# EAGLE board OLM-base_v0.8 (EAGLE 6.4)
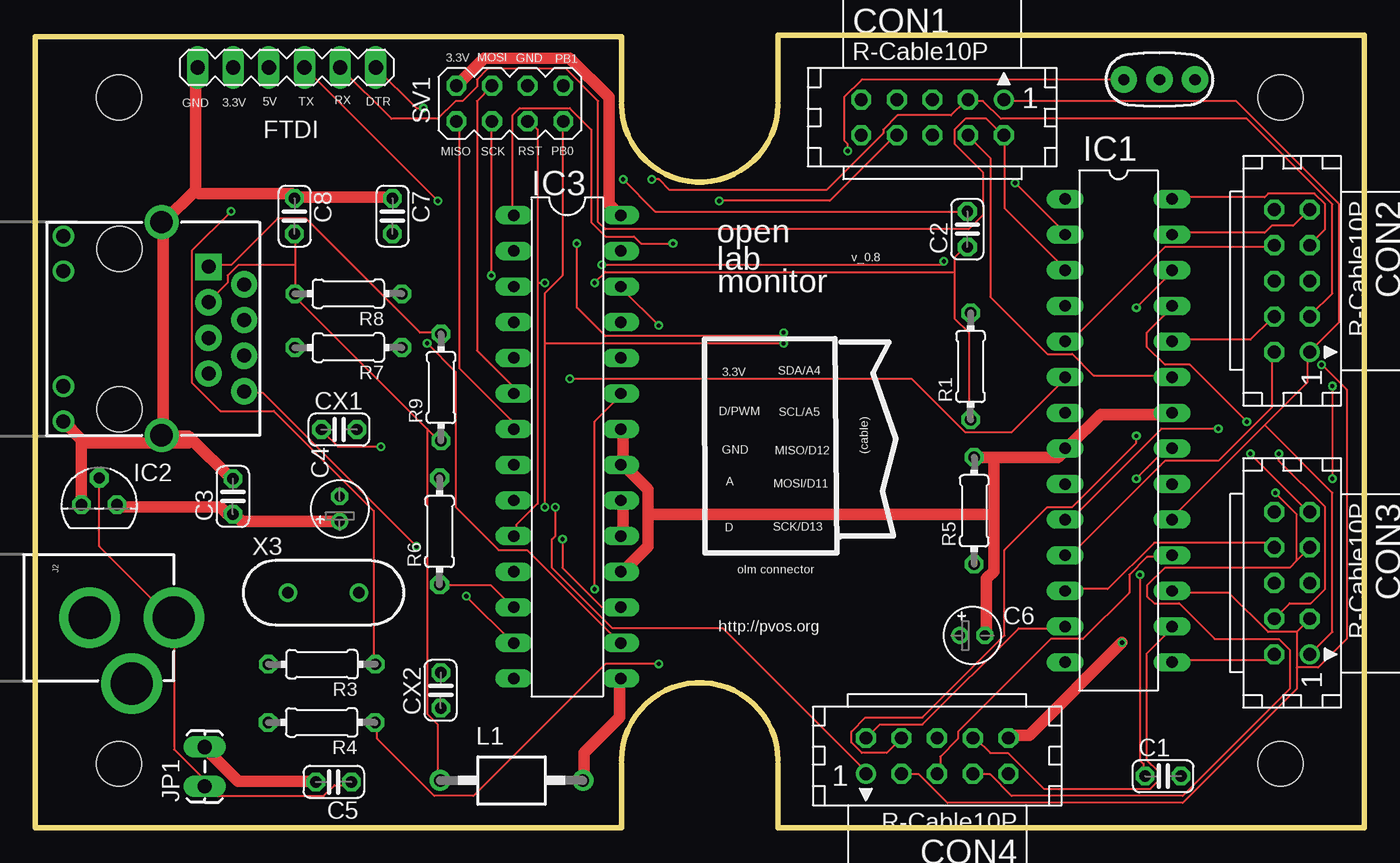
[diagram p0: board, top side]
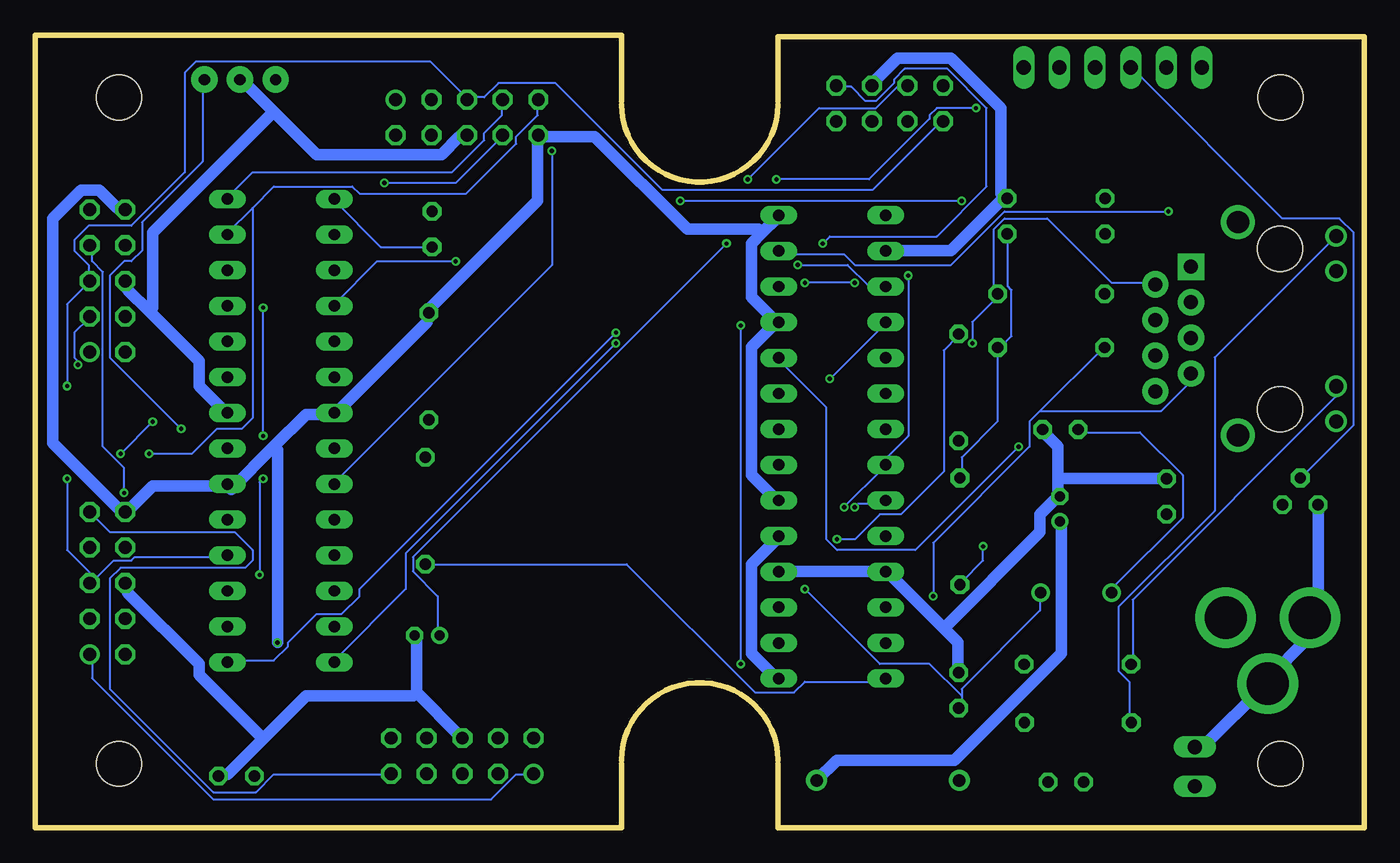
[diagram p1: board, bottom side, seen from below]

Size 94.74 x 56.52 mm. Coordinates in mm from the lower left corner, seen from the top.
Outline: 94.61,0 52.96,0 52.96,4.57
Outline: 41.78,4.57 41.78,0 0,0 0,56.39 41.78,56.39 41.78,51.82
Outline: 41.78,4.83 arc-179 52.96,4.83
Outline: 52.96,56.39 52.96,51.82
Outline: 52.96,51.56 arc-179 41.78,51.56
Outline: 52.96,56.52 94.74,56.52 94.74,0
Copper layers (1*16): Top 0.035mm / dielectric 1.5mm / Bottom 0.035mm
Design rules "Fusion_eagle_rule_v1.1": minimum track width 6mil, minimum drill 12mil, track to track 6mil, track to pad 6mil, pad to pad 6mil, via to via 6mil, smd to smd 0mil, copper to edge 10mil, drill to drill 10mil, minimum pad ring 10mil, minimum via ring 6mil, stop-mask expansion 2mil, vias tented up to drill 100mil, thermal gap 10mil
Net classes: 1 power: width 0.813 mm, clearance 0.203 mm; 2 gnd: width 0.305 mm, drill 0.559 mm, clearance 0.254 mm
Holes 3.2 mm at 5.97,52.07 88.77,52.07 88.77,4.57 5.97,4.57

## Footprints (pad centres in the part's own frame; a part is rotated, then mirrored left to right if it is on the bottom)
C025-024X044 = drill 0.813 octagon: 1 -1.27,0; 2 1.27,0
E1,8-4 = drill 0.711 pad 1.168: + -0.889,0 | drill 0.711 pad 1.168 octagon: - 0.889,0
CON10L = drill 0.914: 1 5.08,1.27 | drill 0.914 octagon: 2 5.08,-1.27; 3 2.54,1.27; 4 2.54,-1.27; 5 0,1.27; 6 0,-1.27; 7 -2.54,1.27; 8 -2.54,-1.27; 9 -5.08,1.27; 10 -5.08,-1.27
MA06-1 = drill 1.016 long: 1 0,0; 2 2.54,0; 3 5.08,0; 4 7.62,0; 5 10.16,0; 6 12.7,0
DIL28-3 = drill 0.813 long: 1 -16.51,-3.81; 2 -13.97,-3.81; 3 -11.43,-3.81; 4 -8.89,-3.81; 5 -6.35,-3.81; 6 -3.81,-3.81; 7 -1.27,-3.81; 8 1.27,-3.81; 9 3.81,-3.81; 10 6.35,-3.81; 11 8.89,-3.81; 12 11.43,-3.81; 13 13.97,-3.81; 14 16.51,-3.81; 15 16.51,3.81; 16 13.97,3.81; 17 11.43,3.81; 18 8.89,3.81; 19 6.35,3.81; 20 3.81,3.81; 21 1.27,3.81; 22 -1.27,3.81; 23 -3.81,3.81; 24 -6.35,3.81; 25 -8.89,3.81; 26 -11.43,3.81; 27 -13.97,3.81; 28 -16.51,3.81
TO92 = drill 0.813 octagon: 1 -1.27,0; 2 0,1.905; 3 1.27,0
MAGJACK = drill 1 pad 1.88 square: 1 3.175,17.445 | drill 1 pad 1.88: 2 4.445,19.985; 3 5.715,17.445; 4 6.985,19.985; 5 8.255,17.445; 6 9.525,19.985; 7 10.795,17.445; 8 12.065,19.985 | drill 1 pad 1.27: 9 1,7.1; 10 3.5,7.1; 11 11.7,7.1; 12 14.2,7.1 | drill 1.6 pad 2.184: M1 0,14.1; M2 15.2,14.1 | hole 3.2: 1.905,11.095; 13.335,11.095
POWER_JACK_PTH = drill 2.997 pad 4.318: GND 0,7.7; GNDBREAK 4.7,10.7; PWR 0,13.7
1X02_LOCK_LONGPADS = drill 1.016 long: 1 -0.127,0; 2 2.667,0
BL01RN1A = drill 0.9 pad 1.5: 1 -5.08,0; 2 5.08,0
0204/7 = drill 0.813 octagon: 1 -3.81,0; 2 3.81,0
MA04-2 = drill 0.9 octagon: 1 -3.81,-1.27; 2 -3.81,1.27; 3 -1.27,-1.27; 4 -1.27,1.27; 5 1.27,-1.27; 6 1.27,1.27; 7 3.81,-1.27; 8 3.81,1.27
RESONATOR-PTH = drill 0.8 pad 1.88: 1 -2.54,0; 2 0,0; 3 2.54,0
HC49US = drill 0.813: 1 -2.54,0; 2 2.54,0

## Placement (x,y rotation side)
C1  0.1µ  [C025-024X044]  80.39,3.68 0 top
C2  0.1µ  [C025-024X044]  66.45,42.67 90 top
C3  0.1µ  [C025-024X044]  14.1,23.62 90 top
C4  10µ  [E1,8-4]  21.72,22.73 90 top
C5  0.1µ  [C025-024X044]  21.29,3.28 180 top
C6  10u  [E1,8-4]  66.8,13.72 0 top
C7  0.1µ  [C025-024X044]  25.48,43.61 270 top
C8  0.1µ  [C025-024X044]  18.49,43.61 270 top
CON1  [CON10L]  63.96,50.65 0 top
CON2  [CON10L]  89.59,38.99 270 top
CON3  [CON10L]  89.59,17.45 270 top
CON4  [CON10L]  64.29,5.13 180 top
CX1  18p  [C025-024X044]  21.67,28.4 0 top
CX2  18p  [C025-024X044]  28.91,9.8 90 top
FTDI  FTDI  [MA06-1]  11.58,54.2 0 top
IC1  ATMEGA  [DIL28-3]  77.22,28.32 270 top
IC2  MCP1702-33  [TO92]  4.57,23.04 0 top
IC3  ENC28J60SP  [DIL28-3]  37.92,27.15 270 top
J1  MAGJACK  [MAGJACK]  -5.08,43.18 270 top
J2  POWER_JACKPTH  [POWER_JACK_PTH]  -3.81,14.99 270 top
JP1  BATT  [1X02_LOCK_LONGPADS]  12.09,3.1 90 top
L1  BL01RN1A  [BL01RN1A]  33.96,3.38 0 top
R1  10k  [0204/7]  66.67,32.89 90 top
R3  1K  [0204/7]  20.45,11.66 180 top
R4  1K  [0204/7]  20.42,7.52 180 top
R5  2.32K  [0204/7]  66.93,22.61 90 top
R6  49.9  [0204/7]  28.83,21.13 90 top
R7  49.9  [0204/7]  22.33,34.24 180 top
R8  49.9  [0204/7]  22.33,38.07 180 top
R9  49.9  [0204/7]  28.93,31.39 90 top
SV1  SPI/ISP  [MA04-2]  33.83,51.64 0 top
X1  16 MHz  [RESONATOR-PTH]  80.14,53.34 0 top
X3  25MHz  [HC49US]  20.55,16.76 0 top

## Library data of the parts
C1-C8 CX1 CX2 R1 = resistor
CON1-CON4 = con-harting; OC_FARNELL: unknown; OC_NEWARK: unknown
FTDI IC2 SV1 = JeeLabs
IC1 = atmega8
IC3 = microchip; MF: MICROCHIP; MPN: ENC28J60/SP; OC_FARNELL: 1084619; OC_NEWARK: 96K3661
J1 JP1 X1 X3 = SparkFun
J2 = SparkFun-Connectors
L1 = inductors
R3-R9 = rcl

## Nets
A0: CON1.4 IC1.23
A1: CON2.4 IC1.24
A2: CON3.4 IC1.25
A3: CON4.4 IC1.26
D0/RX: CON1.8 FTDI.4 IC1.2
D1/TX: CON1.2 FTDI.5 IC1.3
D2: IC1.4 IC3.3
D3/PWM: CON2.8 IC1.5
D4: IC1.6 IC3.4
D5/PWM: CON2.2 IC1.11
D6/PWM: CON3.8 IC1.12
D7: CON4.2 IC1.13
D10/PWM: CON4.8 IC1.16
GND [power]: C1.2 C3.2 C4.- C5.2 C6.- C7.1 C8.1 CON1.6 CON2.6 CON3.6 CON4.6 CX1.2 CX2.2 FTDI.1 IC1.8 IC1.22 IC2.1 IC3.2 IC3.11 IC3.18 IC3.21 IC3.22 J1.12 J1.M1 J1.M2 J2.GND J2.GNDBREAK JP1.2 R5.2 SV1.6 X1.2
LEDA: J1.11 R3.2
LEDB: J1.9 R4.2
MISO/D12: CON1.5 CON2.5 CON3.5 CON4.5 IC1.18 IC3.7 SV1.1
MOSI/D11: CON1.3 CON2.3 CON3.3 CON4.3 IC1.17 IC3.6 SV1.4
N$1: IC1.9 X1.1
N$19: C1.1 IC1.21
N$20: C2.2 FTDI.6
N$21: IC1.10 X1.3
N$36: J1.10
N$37: IC3.27 R3.1
N$39: IC3.26 R4.1
N$50: C6.+ IC3.1
N$51: IC3.14 R5.1
N$52: CX1.1 IC3.24 X3.1
N$53: CX2.1 IC3.23 X3.2
N$54: C7.2 R6.2 R7.1
PB0/D8: IC1.14 IC3.9 SV1.7
PB1/D9/PWM: CON3.2 IC1.15 SV1.8
RD+: IC3.13 J1.7 R7.2
RD-: IC3.12 J1.8 R6.1
RESET: C2.1 IC1.1 IC3.10 R1.1 SV1.5
SCK/D13: CON1.1 CON2.1 CON3.1 CON4.1 IC1.19 IC3.8 SV1.3
SCL/A5: CON1.7 CON2.7 CON3.7 CON4.7 IC1.28
SDA/A4: CON1.9 CON2.9 CON3.9 CON4.9 IC1.27
TCT: C8.2 J1.3 L1.1 R8.2 R9.1
TD+: IC3.17 J1.1 R9.2
TD-: IC3.16 J1.2 R8.1
VCC [power]: C3.1 C4.+ CON1.10 CON2.10 CON3.10 CON4.10 IC1.7 IC1.20 IC2.3 IC3.15 IC3.19 IC3.20 IC3.25 IC3.28 L1.2 R1.2 SV1.2
VIN: C5.1 FTDI.3 IC2.2 J2.PWR JP1.1

## Tracks (layer width: path | path; a pad name or v marks a point on that pad's centre or on a via)
A0
  Top 0.152: IC1.23 81.03,32.26 75.44,32.26 73.91,33.78 72.14,33.78 68.07,37.85 68.07,47.75 66.55,49.28 CON1.4
A1
  Top 0.152: IC1.24 81.03,34.8 86.61,34.8 88.14,36.32 CON2.4
A2  (via drill 0.3)
  Top 0.152: v86.36,28.96 82.3,33.02 80.52,33.02 79.25,34.29 79.25,35.31 81.03,37.08 IC1.25 | v88.65,26.67 88.65,26.16 91.95,22.86 91.95,17.02 90.93,16 89.41,16 CON3.4
  Bottom 0.152: v88.65,26.67 v86.36,28.96
A3  (via drill 0.3)
  Top 0.152: v78.49,37.08 81.03,39.62 IC1.26 | v78.49,27.94 78.49,27.43 73.91,22.86 72.14,22.86 69.09,19.81 69.09,13.72 63.25,7.87 59.18,7.87 58.17,6.86 58.17,6.1 58.93,5.33 60.71,5.33 61.72,6.35 CON4.4
  Bottom 0.152: v78.49,27.94 v78.49,37.08
D0/RX  (via drill 0.3)
  Top 0.152: v69.85,45.97 73.41,42.42 IC1.2 | v28.7,44.7 FTDI.4 | v48.77,44.7 56.64,44.7 61.21,49.28 CON1.8
  Bottom 0.152: v69.85,45.97 64.77,45.97 61.47,49.28 CON1.8 | v48.77,44.7 v28.7,44.7
D1/TX
  Top 0.152: IC1.3 73.41,39.88 69.09,44.2 69.09,49.28 CON1.2 68.83,49.53 67.82,50.55 66.29,50.55 65.53,49.78 65.53,48.77 67.56,46.74 67.56,43.69 66.55,42.67 40.64,42.67 40.13,43.18 40.13,51.82 37.85,54.1 32.26,54.1 31.5,53.34 31.5,52.83 30.48,51.82 29.97,51.82 28.7,50.55 25.4,50.55 FTDI.5
D2  (via drill 0.3)
  Top 0.152: v40.39,40.13 64.52,40.13 v64.77,40.39
  Bottom 0.152: v40.39,40.13 36.83,40.13 35.31,38.61 34.29,38.61 IC3.3 | v64.77,40.39 70.36,40.39 73.41,37.34 IC1.4
D3/PWM
  Top 0.152: IC1.5 73.41,34.8 73.91,34.8 80.52,41.4 88.14,41.4 CON2.8
D4  (via drill 0.3)
  Top 0.152: v38.1,32 62.48,32 66.29,28.19 69.6,28.19 73.41,32 IC1.6
  Bottom 0.152: v38.1,32 34.29,35.81 IC3.4
D5/PWM
  Top 0.152: IC1.11 73.41,19.56 73.91,19.56 80.52,26.16 84.33,26.16 88.14,29.97 88.14,33.78 CON2.2
D6/PWM
  Top 0.152: IC1.12 73.41,17.02 76.45,17.02 79.76,20.32 87.88,20.32 88.14,20.07 CON3.8
D7
  Top 0.152: IC1.13 73.41,14.22 70.1,14.22 63.25,7.37 60.2,7.37 59.44,6.6 CON4.2
D10/PWM
  Top 0.152: IC1.16 81.03,14.22 79.25,12.45 79.25,4.83 80.01,4.06 80.01,3.3 79.5,2.79 71.88,2.79 69.34,5.33 68.07,5.33 67.06,6.35 CON4.8
GND
  Top 0.813: 68.33,26.42 72.9,26.42 73.41,26.92 IC1.8 73.66,27.18 75.95,29.46 81.03,29.46 IC1.22 | 68.33,26.42 R5.2 | 68.33,26.42 68.33,22.35 | 68.33,22.35 68.33,18.29 67.82,17.78 67.82,13.72 C6.- | 11.43,45.47 11.43,54.1 FTDI.1 | 11.43,45.47 9.14,43.18 J1.M1 9.14,42.93 9.14,28.19 J1.M2 9.14,27.94 10.92,27.94 11.18,27.69 | C7.1 25.4,44.96 18.54,44.96 C8.1 18.29,45.21 11.68,45.21 11.43,45.47 | IC3.22 41.91,28.19 41.91,25.91 IC3.21 42.16,25.65 43.69,24.13 43.69,22.35 | 43.69,22.35 43.69,20.07 41.91,18.29 IC3.18 | 3.3,27.43 3.3,27.69 2.03,28.96 J1.12 | 3.3,27.43 IC2.1 | 11.18,27.69 13.97,24.89 C3.2 | 3.3,27.43 10.92,27.43 11.18,27.69 | C5.2 19.81,3.3 14.48,3.3 12.19,5.59 JP1.2 | 43.69,22.35 68.33,22.35
  Bottom 0.813: 67.56,9.65 67.56,13.72 C6.- | 67.56,9.65 64.52,6.6 CON4.6 | 78.49,6.35 75.44,9.4 67.82,9.4 67.56,9.65 | 78.49,6.35 81.03,3.81 81.53,3.81 C1.2 | 78.49,6.35 83.06,10.92 83.06,11.68 88.14,16.76 88.14,17.27 CON3.6 | 77.72,51.05 80.01,53.34 X1.2 | 77.72,51.05 74.68,48.01 65.79,48.01 64.52,49.28 64.01,49.28 CON1.6 | 86.61,36.83 83.06,33.27 83.06,31.5 81.03,29.46 IC1.22 | 86.61,36.83 88.14,38.35 88.14,38.86 CON2.6 | 77.72,51.05 86.36,42.42 86.36,37.08 86.61,36.83 | IC3.2 34.04,41.15 29.46,41.15 25.65,44.96 C7.1 25.91,45.21 25.91,51.31 29.46,54.86 33.27,54.86 35.05,53.09 SV1.6 | 29.97,14.22 34.04,18.29 IC3.11 34.54,18.29 41.66,18.29 IC3.18 | 29.97,14.22 28.96,13.21 28.96,11.18 CX2.2 | 21.84,24.89 21.84,27.18 22.86,28.19 CX1.2 | 21.84,24.89 21.84,23.62 C4.- 22.1,23.37 23.11,22.35 23.11,21.08 29.97,14.22 | 21.84,24.89 C3.2 | JP1.2 11.94,5.84 11.43,5.84 7.11,10.16 J2.GNDBREAK 6.86,10.67 4.06,13.46 4.06,14.99 J2.GND 3.81,15.24 3.3,15.75 IC2.1
LEDA
  Bottom 0.152: R3.2 16.51,11.68 16.51,16.26 2.03,30.73 2.03,31.24 J1.11
LEDB
  Bottom 0.152: R4.2 16.76,7.62 16.76,10.41 17.53,11.18 17.53,15.75 10.67,22.61 10.67,33.53 2.03,42.16 J1.9
MISO/D12  (via drill 0.3)
  Top 0.152: CON4.5 64.52,4.06 64.52,5.08 65.79,6.35 65.79,6.86 72.39,13.46 74.68,13.46 77.98,16.76 77.98,18.03 79.25,19.3 81.03,19.3 IC1.18 | IC3.7 34.04,28.45 34.04,28.96 30.23,32.77 30.23,50.29 SV1.1 | v92.46,31.5 v92.46,24.89
  Bottom 0.152: 90.42,17.78 90.68,17.53 CON3.5 90.42,17.78 | 90.42,17.78 89.15,19.05 87.88,19.05 87.63,19.3 81.03,19.3 IC1.18 | SV1.1 30.23,50.29 35.05,45.47 50.04,45.47 57.66,53.09 61.72,53.09 62.74,52.07 63.75,52.07 CON1.5 64.01,52.07 66.55,54.61 83.31,54.61 84.07,53.85 84.07,46.74 87.88,42.93 90.93,42.93 91.95,41.91 91.95,41.15 90.93,40.13 90.93,39.12 CON2.5 90.93,38.86 92.46,37.34 v92.46,31.5 | 90.42,17.78 92.46,19.81 v92.46,24.89
MOSI/D11  (via drill 0.3)
  Top 0.152: 89.92,13.97 87.88,13.97 85.09,16.76 81.03,16.76 IC1.17 | CON3.3 89.92,13.97 | 89.92,13.97 89.92,11.43 | 89.92,11.43 89.92,9.91 81.79,1.78 65.02,1.78 62.99,3.81 61.98,3.81 CON4.3 | IC3.6 34.04,30.99 34.04,31.5 31.5,34.04 31.5,51.82 32.51,52.83 SV1.4 | CON2.3 90.93,36.58 92.46,38.1 92.46,44.45 86.36,50.55 68.83,50.55 67.56,51.82 66.55,51.82 CON1.3 66.29,51.82 65.28,50.8 61.47,50.8 60.45,49.78 60.45,49.53 56.39,45.47 45.21,45.47 44.45,46.23 v43.94,46.23 | 89.92,11.43 91.44,11.43 93.47,13.46 93.47,31.24 v91.69,33.02
  Bottom 0.152: v43.94,46.23 38.86,51.31 34.8,51.31 33.27,52.83 32.77,52.83 SV1.4 | v91.69,33.02 91.69,33.27 91.95,33.53 91.95,35.31 90.93,36.32 CON2.3
N$1  (via drill 0.3)
  Top 0.152: v57.91,48.26 57.91,48.77 57.66,49.02 57.66,52.07 58.93,53.34 X1.1
  Bottom 0.152: v57.91,48.26 57.91,40.13 73.41,24.64 IC1.9
N$19  (via drill 0.3)
  Top 0.152: v78.74,18.03 78.74,4.83 78.99,4.57 78.99,3.81 C1.1 | v78.49,24.89 80.52,26.92 81.03,26.92 IC1.21
  Bottom 0.152: v78.74,18.03 78.74,24.64 v78.49,24.89
N$20  (via drill 0.3)
  Top 0.152: C2.2 44.2,43.94 v41.91,46.23 | v27.69,51.31 27.18,51.31 FTDI.6
  Bottom 0.152: v41.91,46.23 35.31,46.23 30.99,50.55 30.99,50.8 30.48,51.31 v27.69,51.31
N$21  (via drill 0.3)
  Top 0.152: v84.33,28.45 80.26,28.45 73.91,22.1 73.41,22.1 IC1.10
  Bottom 0.152: v84.33,28.45 89.41,33.53 89.41,39.37 88.39,40.39 87.88,40.39 87.12,41.15 87.12,43.18 82.8,47.5 82.8,53.34 X1.3
N$37  (via drill 0.3)
  Top 0.152: v13.97,43.94 11.18,41.15 11.18,31.75 13.21,29.72 17.02,29.72 24.13,22.61 24.13,11.68 R3.1
  Bottom 0.152: v13.97,43.94 25.65,43.94 29.46,40.13 36.32,40.13 37.08,40.89 41.66,40.89 IC3.27
N$39  (via drill 0.3)
  Top 0.152: v44.45,11.68 40.64,11.68 31.24,2.29 28.45,2.29 24.38,6.35 24.38,7.37 R4.1 | v44.45,35.81 41.91,38.35 IC3.26
  Bottom 0.152: v44.45,35.81 v44.45,11.68
N$50  (via drill 0.3)
  Top 0.152: v45.47,41.66 43.18,41.66 42.67,42.16 40.64,42.16 39.62,43.18 39.62,49.78 38.1,51.31 34.54,51.31 34.04,50.8 34.04,43.69 IC3.1
  Bottom 0.152: v45.47,41.66 67.82,19.3 67.82,18.29 66.04,16.51 66.04,13.72 C6.+
N$51
  Bottom 0.152: R5.1 52.58,18.8 43.43,9.65 40.64,9.65 39.88,10.41 34.29,10.41 IC3.14
N$52  (via drill 0.3)
  Top 0.152: v24.64,27.18 21.59,27.18 20.57,28.19 CX1.1
  Bottom 0.152: X3.1 17.78,16.76 17.78,17.27 12.95,22.1 12.95,25.15 16,28.19 20.32,28.19 CX1.1 | v24.64,27.18 32,19.81 37.59,19.81 38.35,20.57 38.35,29.97 41.66,33.27 IC3.24
N$53  (via drill 0.3)
  Top 0.152: v39.88,17.02 39.88,28.96 41.66,30.73 IC3.23
  Bottom 0.152: 28.7,9.4 28.7,9.91 23.11,15.49 23.11,16.76 X3.2 | 28.7,9.4 28.7,8.64 CX2.1 | v39.88,17.02 34.54,11.68 30.99,11.68 28.7,9.4
N$54
  Bottom 0.152: R6.2 28.7,25.15 28.7,26.42 26.16,28.96 26.16,34.04 R7.1 25.91,34.29 25.15,35.05 25.15,38.35 25.4,38.61 25.4,42.16 C7.2
PB0/D8  (via drill 0.3)
  Top 0.152: 36.32,34.54 36.32,38.1 37.59,39.37 37.59,50.29 SV1.7 | 36.32,34.54 v36.32,22.86 | 36.32,34.54 v53.34,34.54
  Bottom 0.152: v36.32,22.86 36.07,23.11 34.29,23.11 IC3.9 | v53.34,34.54 68.33,19.56 68.33,17.02 73.41,11.94 IC1.14
PB1/D9/PWM  (via drill 0.3)
  Top 0.152: CON3.2 87.88,11.94 81.03,11.94 IC1.15 | v38.61,41.66 38.61,37.08 40.64,35.05 53.09,35.05 v53.34,35.31
  Bottom 0.152: v38.61,41.66 38.1,42.16 30.48,42.16 26.92,45.72 26.92,51.31 29.72,54.1 32.77,54.1 33.53,53.34 33.53,53.09 34.8,51.82 35.56,51.82 36.58,52.83 37.59,52.83 SV1.8 | v53.34,35.31 71.63,17.02 71.63,16.51 72.9,15.24 74.68,15.24 76.71,13.21 76.71,12.95 77.72,11.94 81.03,11.94 IC1.15
RD+  (via drill 0.3)
  Top 0.152: v30.73,16.51 34.04,13.21 IC3.13
  Bottom 0.152: v30.73,16.51 30.73,20.32 23.88,27.18 23.88,28.96 23.11,29.72 | 23.11,29.72 18.54,34.29 R7.2 | 23.11,29.72 14.48,29.72 12.45,31.75 12.45,32.26 J1.7
RD-  (via drill 0.3)
  Top 0.152: R6.1 28.96,17.27 32.51,17.27 34.04,15.75 IC3.12 | v27.18,20.07 16.26,30.99 14.99,30.99 J1.8
  Bottom 0.152: v27.18,20.07 27.18,19.05 28.7,17.53 R6.1
RESET  (via drill 0.3)
  Top 0.152: 65.53,39.62 65.53,40.64 66.29,41.4 C2.1 | 65.53,39.62 65.53,36.32 66.55,35.31 66.55,29.21 R1.1 | 35.81,38.86 35.81,49.78 35.31,50.29 SV1.5 | 35.81,38.86 35.81,23.11 34.29,21.59 34.29,20.83 IC3.10 | 65.53,39.62 40.64,39.62 v39.88,38.86 | 35.81,38.86 v36.32,38.86
  Bottom 0.152: C2.1 70.1,41.4 73.41,44.7 IC1.1 | v36.32,38.86 v39.88,38.86
SCK/D13  (via drill 0.3)
  Top 0.152: 87.63,28.7 90.68,31.75 90.68,33.78 CON2.1 90.93,34.04 92.96,36.07 92.96,44.45 85.6,51.82 69.09,51.82 CON1.1 | 87.63,28.7 81.03,22.1 IC1.19 | v32.51,39.37 32.51,50.29 SV1.3 | v37.08,22.86 37.08,20.83 36.83,20.57 36.83,18.54 41.15,14.22 49.02,14.22 59.18,4.06 CON4.1 | 87.63,28.7 92.46,23.88 92.46,13.97 CON3.1
  Bottom 0.152: v32.51,39.37 32.51,27.94 34.04,26.42 34.04,25.91 IC3.8 34.29,25.65 v37.08,22.86 | CON4.1 59.44,3.81 60.45,3.81 62.23,2.03 82.04,2.03 90.68,10.67 90.68,12.19 CON3.1
SCL/A5  (via drill 0.3)
  Top 0.152: IC1.28 81.03,44.96 87.63,44.96 87.88,45.21 91.19,45.21 91.95,44.45 91.95,42.67 90.93,41.66 CON2.7 | CON3.7 89.92,19.05 | 89.92,19.05 89.41,18.54 80.52,18.54 79.25,17.27 79.25,16.51 79.76,16 81.53,16 84.07,13.46 88.65,13.46 89.41,12.7 89.41,9.91 81.79,2.29 69.6,2.29 68.07,3.81 67.06,3.81 CON4.7 | v88.39,23.88 89.92,22.35 89.92,19.05
  Bottom 0.152: CON1.7 61.47,51.82 61.47,50.8 62.74,49.53 62.74,49.02 65.02,46.74 79.25,46.74 81.03,44.96 IC1.28 | v88.39,23.88 88.39,25.65 89.92,27.18 89.92,39.62 90.68,40.39 90.68,41.4 CON2.7
SDA/A4  (via drill 0.3)
  Top 0.152: IC1.27 81.03,42.42 87.63,42.42 88.14,42.93 89.66,42.93 90.68,43.94 CON2.9 | v86.61,26.67 90.68,22.61 CON3.9
  Bottom 0.152: CON3.9 89.41,21.08 80.52,21.08 79.25,19.81 79.25,19.05 79.76,18.54 88.65,18.54 89.41,17.78 89.41,9.91 82.04,2.54 78.99,2.54 77.72,3.81 69.6,3.81 CON4.9 | 79.25,44.2 81.03,42.42 IC1.27 | 79.25,44.2 77.72,45.72 72.14,45.72 71.63,45.21 64.01,45.21 60.45,48.77 60.45,49.28 58.93,50.8 58.93,51.82 CON1.9 | v86.61,26.67 83.57,26.67 81.79,28.45 80.01,28.45 79.25,29.21 79.25,44.2
TCT
  Top 0.152: 18.54,40.13 18.54,42.16 C8.2 | 18.54,40.13 18.54,38.1 R8.2 18.54,37.85 27.94,28.45 | 27.94,28.45 28.7,27.69 R9.1 | 27.94,28.45 27.94,8.13 28.7,7.37 28.7,3.56 L1.1 | 18.54,40.13 14.48,40.13 13.72,39.37 13.72,38.86 12.45,37.59 J1.3
TD+  (via drill 0.3)
  Top 0.152: v37.59,20.57 37.59,18.54 40.39,15.75 41.66,15.75 IC3.17 | J1.1 12.45,40.13 13.97,40.13 17.27,43.43 19.3,43.43 27.43,35.31 28.7,35.31 R9.2
  Bottom 0.152: v37.59,20.57 36.32,20.57 34.54,22.35 33.02,22.35 29.97,25.4 29.97,34.04 28.96,35.05 R9.2
TD-  (via drill 0.3)
  Top 0.152: v27.94,34.54 29.97,32.51 29.97,22.86 33.02,19.81 35.05,19.81 41.66,13.21 IC3.16
  Bottom 0.152: v27.94,34.54 27.94,36.07 26.42,37.59 | 26.42,37.59 26.16,37.85 R8.1 26.42,37.59 | 26.42,37.59 26.42,42.67 25.65,43.43 22.61,43.43 18.03,38.86 14.99,38.86 J1.2
VCC  (via drill 0.3)
  Top 0.813: v77.47,13.21 70.87,6.6 69.6,6.6 CON4.10 | SV1.2 30.23,53.09 32,54.86 38.1,54.86 40.89,52.07 40.89,44.45 41.66,43.69 IC3.28 | C4.+ 14.73,21.84 14.22,22.35 C3.1 13.72,22.35 13.21,22.86 5.84,22.86 IC2.3 | IC3.19 41.91,20.83 41.91,23.11 IC3.20 | IC3.15 41.66,10.41 41.66,7.87 39.12,5.33 39.12,3.56 L1.2
  Bottom 0.813: 77.72,27.18 80.77,24.13 IC1.20 81.03,24.38 86.36,24.38 88.14,22.61 CON3.10 88.65,22.61 93.47,27.43 93.47,43.43 91.44,45.47 90.17,45.47 88.9,44.2 88.39,44.2 CON2.10 | 77.72,27.18 75.44,29.46 73.41,29.46 IC1.7 73.15,29.72 66.8,36.07 66.8,36.58 R1.2 66.55,37.08 58.93,44.7 58.93,49.28 CON1.10 58.67,49.28 54.86,49.28 48.26,42.67 43.18,42.67 42.93,42.42 | v77.47,13.21 77.47,26.92 77.72,27.18 | 42.93,42.42 41.91,43.43 IC3.28 | 42.93,42.42 43.69,41.66 43.69,37.85 41.91,36.07 IC3.25 42.16,35.81 43.69,34.29 43.69,25.15 41.91,23.37 IC3.20 | IC3.19 41.91,20.57 43.69,18.8 43.69,12.45 41.91,10.67 IC3.15 | L1.2 37.59,4.83 29.21,4.83 21.59,12.45 21.59,21.84 C4.+
VIN
  Top 0.152: C5.1 22.35,3.05 21.34,3.05 20.57,2.29 12.7,2.29 12.19,2.79 JP1.1 11.94,3.05 11.94,3.56 9.91,5.59 9.91,14.99 J2.PWR 9.65,14.99 4.57,20.07 IC2.2
  Bottom 0.152: FTDI.3 16.51,54.1 5.84,43.43 1.78,43.43 0.76,42.42 0.76,28.7 4.57,24.89 IC2.2

## Text on the board
tPlace: 3.3V | MOSI | GND | PB1 | GND | 3.3V | RX | 5V | TX | DTR | MISO | SCK | PB0 | RST | open | lab | v_0.8 | monitor | 3.3V | SDA/A4 | D/PWM | SCL/A5 | GND | MISO/D12 | (cable) | A | MOSI/D11 | D | SCK/D13 | olm connector | http://pvos.org